# Altium PCB Micro.PcbDoc
Units mm, origin at the board's own origin, x right, y up, seen from the top; angles counter-clockwise.
Board outline 16 x 16 mm, 2 copper layers (Top Layer, Bottom Layer); 3 components, 3 nets, 11 pads, 0 vias.
Unrouted connection lines stored in the file: 1.
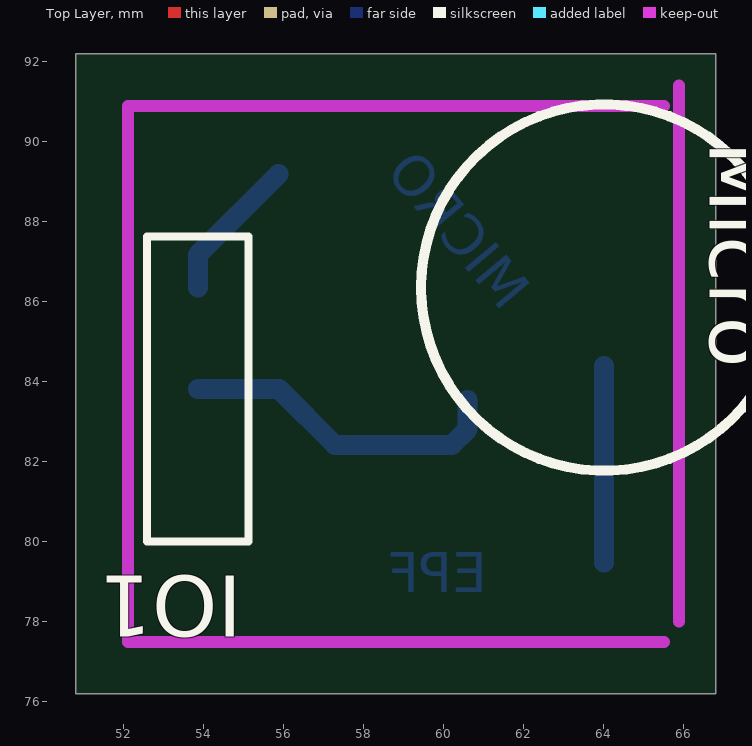
[diagram p0: Top Layer view]
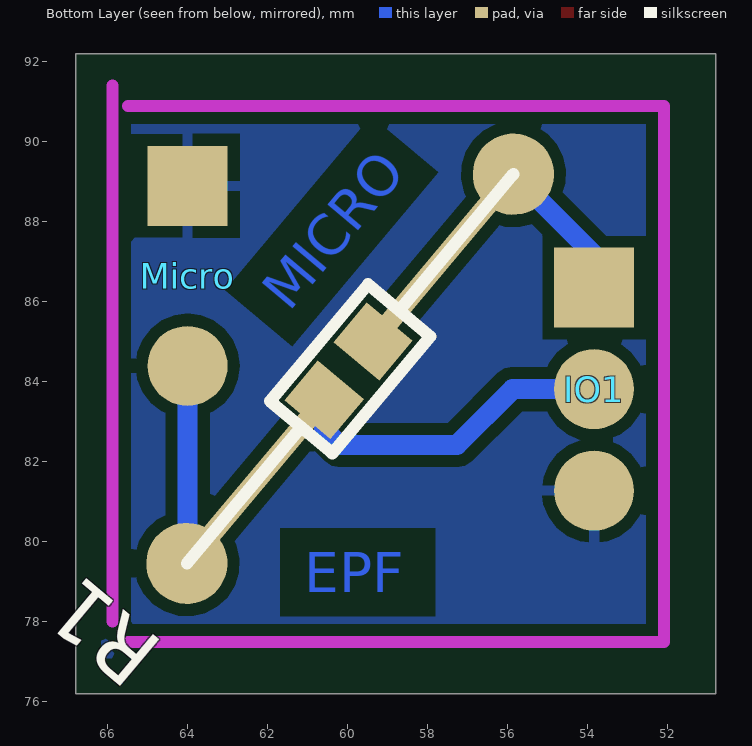
[diagram p1: Bottom Layer view, seen from below]

## Layer stack, top to bottom
Top Layer: signal copper 0.0356
Dielectric: dielectric 0.32, FR-4, Dk 4.8
Bottom Layer: signal copper 0.0356

## Board outline
50.8,76.2 66.8,76.2 66.8,92.2 50.8,92.2

## Design rules (kind name [scope] priority, off if disabled: settings)
Clearance [All] p1: gap=0.3
ComponentClearance [All] p1: gap=0.254 collisioncheckmode=3 verticalgap=0.254
PolygonConnect [All] p1: connectstyle=Relief reliefconductorwidth=0.254 reliefentries=4 polygonreliefangle="90 Angle"
RoomDefinition MicroFM [InComponentClass('MicroFM')] p1: confinementstyle=ConfineIn formatcopy=TRUE lockcomponents=FALSE outline 52.07,77.343 66.04,77.343 66.04,90.805 52.07,90.805
RoutingVias [All] p1: holewidth=0.8 width=1.6 viastyle="Through Hole" minholewidth=0.711 minwidth=1.27 maxholewidth=0.711 maxwidth=1.27
SolderMaskExpansion [All] p1: expansion=0.102
TestPointUsage [All] p1: valid=0 allowmultiple=FALSE
Testpoint [All] p1: side=15 testpointundercomponent=TRUE minsize=1.016 maxsize=2.54 preferedsize=1.524 minholesize=0 maxholesize=1.016 preferedholesize=0.813 testpointgrid=0.025 style=1023 order=0-112345678
Width [All] p1: maxlimit=1 minlimit=0.3 preferedwidth=0.5
17 further rules are at their usual default settings.

## Components (designator, comment, footprint, x,y, rotation, side; value= is the part's Value field where it differs from the comment)
IO1 "MicroIO" MicroIO3x1 53.848,86.36 r270 top
Micro "Comment" MIC1 64.008,88.9 r270 top
R1 "4k7" proto-resistor 59.944,84.328 r310 bottom

## Footprints (in the part's own frame and the unit in brackets; to place one, negate y for a bottom-side part, rotate by r counter-clockwise, add the part's x,y. Pads: shape width x height; smd on the part's side, far side on the other; paste and mask are expansions set on the pad)
MIC1 [mm]
  rect 2x2 smd far side: 0(0,0)
  round 2 smd far side: 1(4.5,0)
  silkscreen extent -2.04,-4.58 7.12,4.58
MicroIO3x1 [mm]
  rect 2x2 smd far side: 0(0,0)
  round 2 smd far side: 1(2.54,0) 2(5.08,0)
  silkscreen extent -1.27,-1.27 6.35,1.27
proto-resistor [mil] "Resistencia 0805+puente prototipo"
  round 80 smd: 1(-250,0) 2(250,0)
  rect 215x20 smd: 1(-145,0) 2(144.8,0)
  rect 51.18x59.06 smd: 1(-35,0)
  rect 51.18x59.05 smd: 2(39.8,0)
  silkscreen extent -250,-40 250,40

## Part data
R1: library part proto-resistor, "Resistencia con conector de prototipado"

## Nets (pads, with @x,y where several pads share a name; then routed paths per layer and width w, separated by ;. In a path a pad name is that pad's centre, name@x,y a point inside that pad or via, vN(x,y) a via of type N, cw(c..) or ccw(c..) an arc to the next point about the centre after c; other vN are vias at no path point)
NetIO1_0: IO1.0 R1.1 | length 3.7
  Bottom Layer w0.5: IO1.0 53.848,87.178 R1.1@55.862,89.192
NetIO1_1: IO1.1 Micro.1 R1.2 | length 13.1
  Bottom Layer w0.5: IO1.1 55.88,83.82 57.277,82.423 60.198,82.423 60.594,82.819 R1.2@60.594,83.554 ; R1.2@64.008,79.481 Micro.1
NetIO1_2: IO1.2 Micro.0

## Polygon pours and split planes (outlines as drawn)
NetIO1_2 on Bottom Layer (solid): 51.816,91.186 51.816,77.089 66.167,77.089 66.167,91.186

## Keep-outs
Keep-Out Layer:
  lines w0.3: 65.5,77.5 52.1,77.5 52.1,90.9 65.5,90.9 ; 65.881,78.008 65.881,91.408

## Other copper
Bottom Layer:
  text "MICRO" at 61.468,85.725 h1 r310
  text "EPF" at 61.087,78.74 h1

## Silkscreen, mask and mechanical layers (free items; w line width, h text height)
Drill Drawing:
  text ".LEGEND" at 72.261,81.788 h1.52
  text "Drill Drawing." at 71.88,78.74 h1.52

## Dimensions
52.1,77.5 to 65.5,77.5 on Mechanical 1
52.1,77.5 to 52.1,90.9 on Mechanical 1